# Allegro board hvps-2.brd
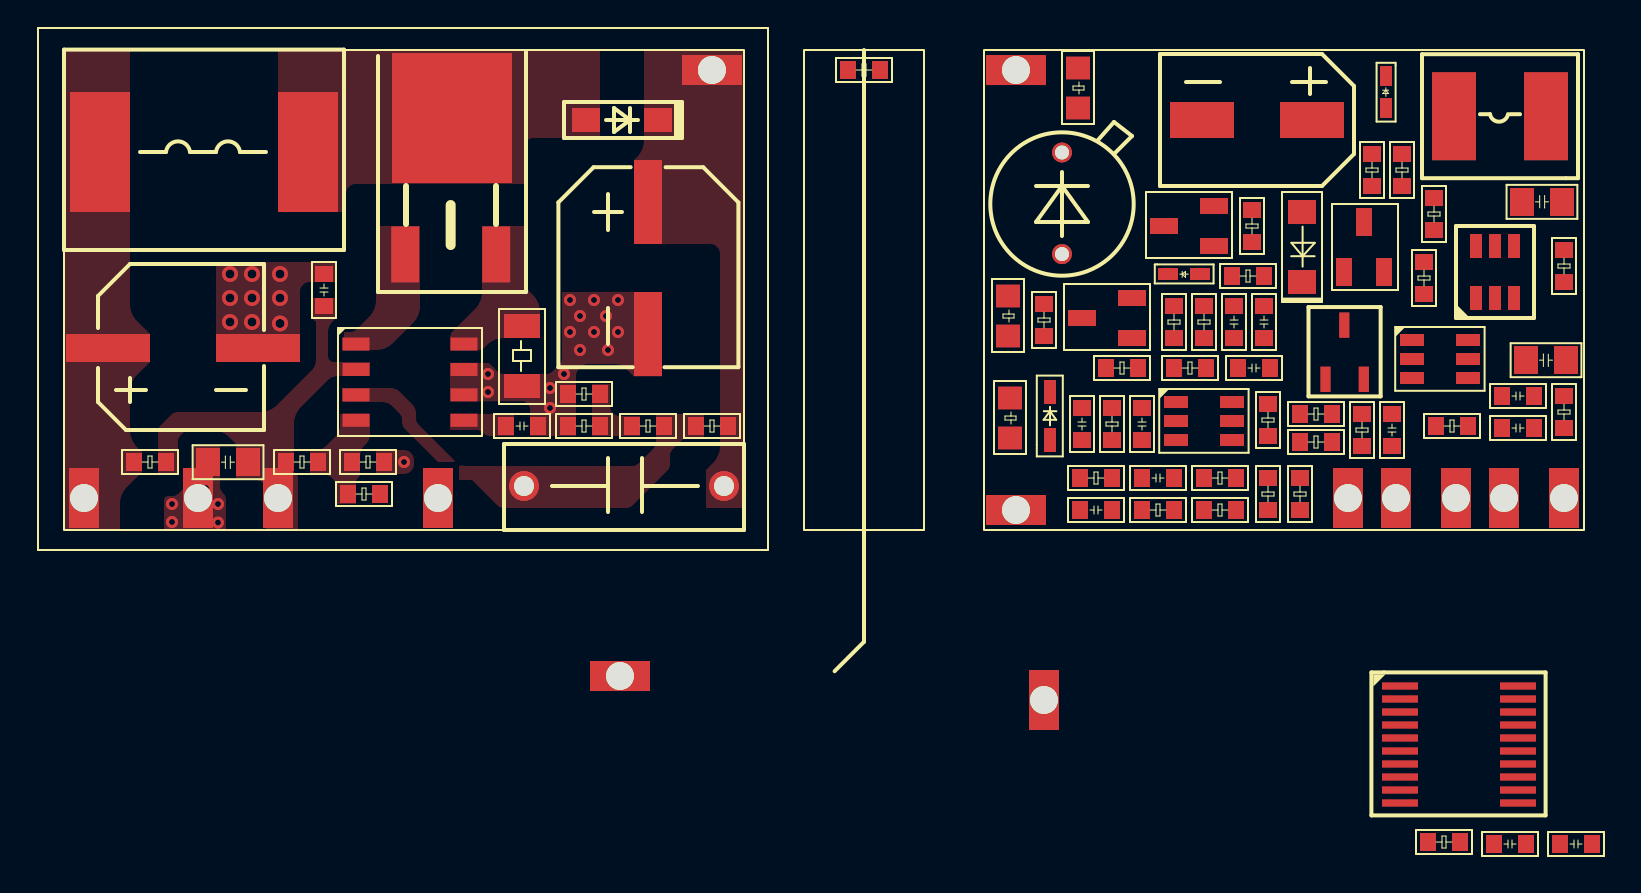
[diagram p0: board, top side]
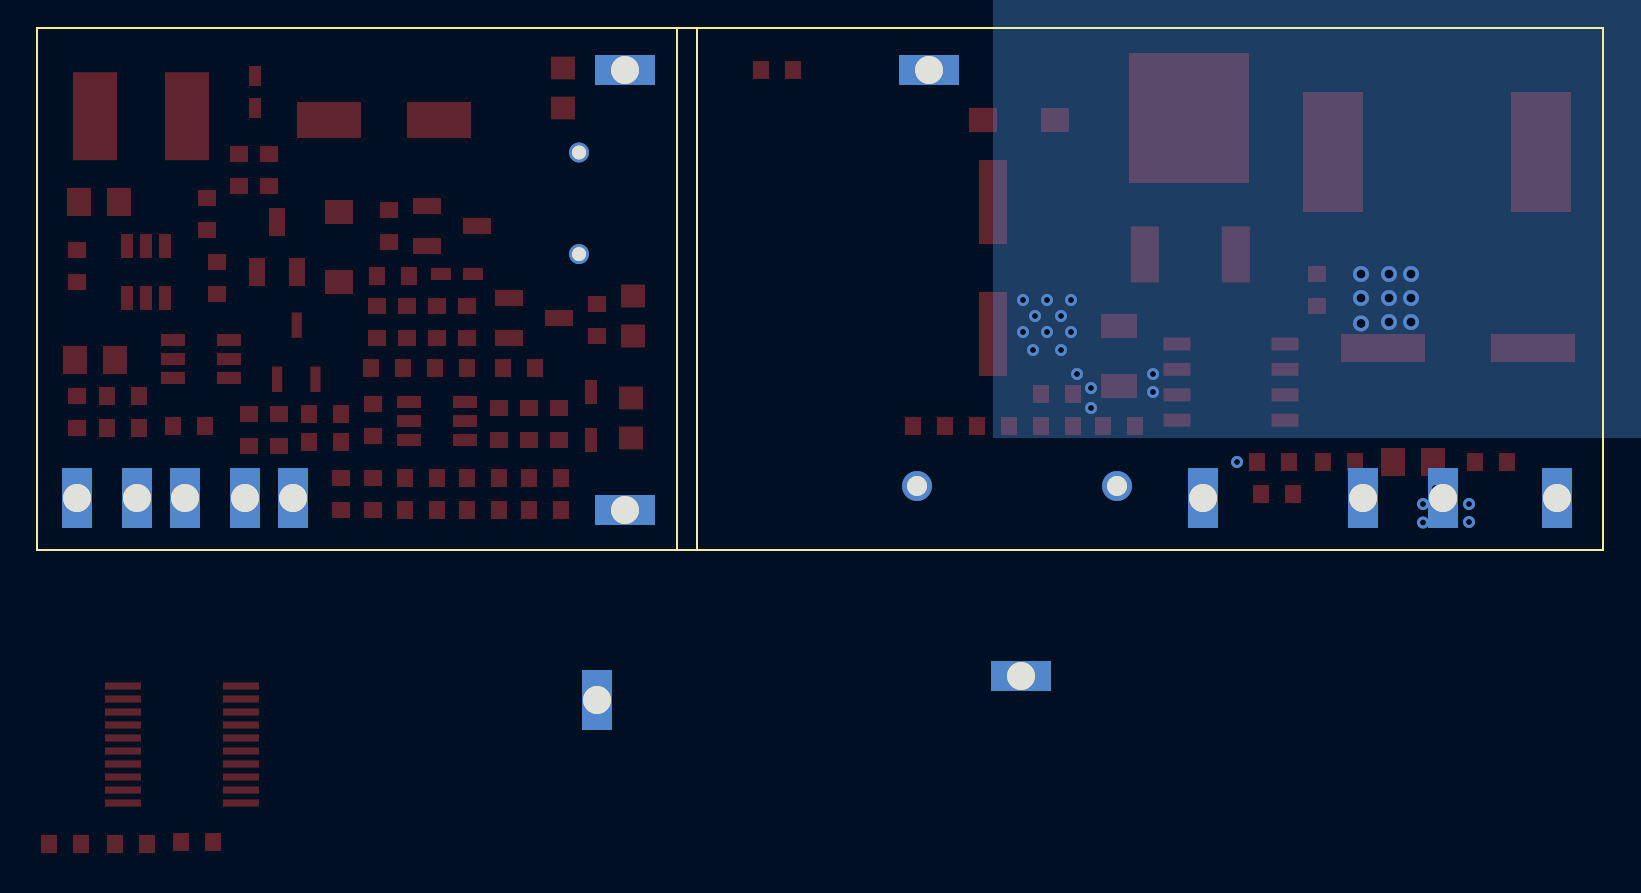
[diagram p1: board, bottom side, seen from below]

No outline. copper layers: TOP, BOTTOM. Coordinates in mm from the lowest, leftmost part position.

## Design rules (mm)
constraint set DEFAULT: min track width 0.254

## Placement (name value [footprint] x y rotation side)
C1  4.7uF/400V  [CAP-SMD-D8D0-L10D3-B8D3]  28.2 32.1 270 top
C2  0.1uF/35V  [C0603]  12 26.9 90 top
C3  220uF/35V  [CAP-SMD-D8D0-L8D3-W8D3-P7D5]  1.2 24.8 0 top
C4  10uF/35V  [C0805]  8.2 19.1 180 top
C5  0.1uF/35V  [C0603]  21.1 20.9 0 top
C6  0.1uF/400V  [CAP-THR-L11D4-W3D8-P10D0-D0D8]  32 17.9 180 top
C15  100uF/35V  [CAP-SMD-L6D6-W6D6-P5D5-MM]  61.4 36.2 180 top
C30  0.1uF/16V  [C0603]  49.9 20.2 90 top
C34  10uF/16V  [C0603]  70.9 20.8 0 top
C35  0.1uF/16V  [C0603]  70.9 22.4 0 top
C36  0.1uF/16V  [C0603]  65.4 19.9 90 top
C37  10uF/35V  [C0805]  74.1 24.2 180 top
C38  10uF/35V  [C0805]  71.9 32.1 0 top
C39  0.1uF/16V  [C0603]  73.8 0 0 top
C40  0.1uF/16V  [C0603]  70.5 0 0 top
C41  10uF/16V  [C0603]  59 25.3 90 top
C42  0.1uF/16V  [C0603]  57.5 25.3 90 top
C43  0.1uF/16V  [C0603]  52.9 21.8 270 top
C44  0.1uF/16V  [C0603]  52.9 18.3 0 top
C45  0.1uF/16V  [C0603]  49.8 16.7 0 top
C46  0.1uF/16V  [C0603]  57.7 23.8 0 top
D1  E1G  [SOD-123FL]  28.7 36.2 180 top
D2  PTVSLC3D3V3B  [SOD323-L1D8-W1D3-P2D4-MM]  48.3 20.2 90 top
D4  SAPD  [SAPD-THR-2P]  48.9 32 90 top
D7  BAS521-7  [SOD-523-L1D2-W0D8-P1D6-MM]  65.1 38.4 270 top
D11  MMSZ12T1G  [SOD-123-L2D8-W1D8-P3D5-MM]  60.9 28.1 90 top
D12  BAS521-7  [SOD-523-L1D2-W0D8-P1D6-MM]  54.2 28.5 0 top
L1  100uH/2A  [IND-SMD-L11D5-W10D0-P10D4]  0.8 34.6 0 top
L4  47uH/1A  [IND-SMD-L5D0-W5D0-P4D6-MM]  73.1 36.39 180 top
NOREF  -  []  9.7 17.3 0 top
NOREF#2  -  []  23.05 24.27 90 top
NOREF#3  -  []  6.3 20.7 90 top
NOREF#4  -  []  16.06 29.48 0 top
NOREF#5  -  []  26.8 8.4 90 top
NOREF#6  -  []  25.1 36.2 0 top
NOREF#7  -  []  21.9 22 90 top
NOREF#8  -  []  21.9 22.9 90 top
NOREF#9  -  []  16.06 29.48 0 top
NOREF#10  -  []  26.5 30.4 0 top
NOREF#11  -  []  0.7 22.95 0 top
NOREF#12  -  []  31.6 27.6 90 top
NOREF#13  -  []  28.2 25.5 90 top
NOREF#14  -  []  5.7 17.3 0 top
NOREF#15  -  []  1.2 24.8 0 top
NOREF#16  -  []  0 17.3 0 top
Q1  AOD458  [TO-252-2-DPAK]  18.4 36.3 90 top
Q3  FH3400C  [SOT-23-3-L2D9-W1D3-P1D9-MM]  52.4 27.3 0 top
Q5  FH3400C  [SOT-23-3-L2D9-W1D3-P1D9-MM]  65 28.6 270 top
Q9  AO3401A  [SOT-23-3-L2D9-W1D3-P1D9-MM]  56.5 31.9 0 top
R1  50mR  [R1206]  21.9 25.9 270 top
R2  DNP  [R0603]  25.8 22.5 180 top
R3  10K  [R0603]  25.8 20.9 180 top
R4  0  [R0603]  29 20.9 180 top
R5  1.5M  [R0603]  32.2 20.9 180 top
R6  DNP  [R0603]  10.1 19.1 0 top
R7  0  [R0603]  15 19.1 180 top
R8  DNP  [R0603]  2.5 19.1 0 top
R9  DNP  [R0603]  14.8 17.5 180 top
R10  682  [R0603]  62.4 20.1 180 top
R11  332K  [R0805]  46.2 25.4 90 top
R12  0  [R0603]  48 25.4 90 top
R16  10K  [R0603]  67.6 20.9 0 top
R18  1M  [R0603]  59 28.4 180 top
R22  1K  [R0603]  58.4 31.7 270 top
R26  1K  [R0603]  67.5 30.7 90 top
R28  100  [R0603]  67 27.5 90 top
R33  182K  [R0603]  64.4 34.5 270 top
R35  10K  [R0603]  65.9 32.9 90 top
R36  0  [R0603]  74 20.8 90 top
R40  10K  [R0603]  74 28.1 90 top
R41  100K  [R0805]  46.3 20.3 90 top
R42  100  [R0603]  56 26.9 270 top
R43  1K  [R0603]  54.5 25.3 90 top
R56  100K  [R0603]  51.4 20.2 90 top
R57  4.99K  [R0603]  60.8 21.5 0 top
R60  499  [R0603]  59.2 16.7 90 top
R61  0  [R0603]  54.5 23.8 0 top
R62  10K  [R0603]  63.9 19.9 90 top
R63  1K  [R0603]  60.8 16.7 90 top
R64  0  [R0603]  67.2 0.1 0 top
R65  4.99K  [R0603]  56 16.7 0 top
R66  4.99K  [R0603]  54.5 16.7 180 top
R67  100K  [R0603]  49.8 18.3 0 top
R68  4.99K  [R0603]  59.2 22 270 top
R69  100K  [R0603]  56 18.3 0 top
R70  100K  [R0603]  51.1 23.8 0 top
R71  0  [R0805]  49.7 36.8 90 top
R72  0  [R0603]  38.2 38.7 0 top
TP1  T POINT F  [STAMP_HOLE_1D5X3D0_1D4]  26.8 8.4 270 top
TP2  T POINT F  [STAMP_HOLE_1D5X3D0_1D4]  31.4 38.7 270 top
TP3  T POINT F  [STAMP_HOLE_1D5X3D0_1D4]  0 17.3 180 top
TP4  T POINT F  [STAMP_HOLE_1D5X3D0_1D4]  5.7 17.3 180 top
TP5  T POINT F  [STAMP_HOLE_1D5X3D0_1D4]  9.7 17.3 180 top
TP6  T POINT F  [STAMP_HOLE_1D5X3D0_1D4]  17.7 17.3 180 top
TP16  QUENCH  [STAMP_HOLE_1D5X3D0_1D4]  68.6 17.3 180 top
TP25  RESET  [STAMP_HOLE_1D5X3D0_1D4]  63.2 17.3 180 top
TP32  T POINT F  [STAMP_HOLE_1D5X3D0_1D4]  71 17.3 180 top
TP33  T POINT F  [STAMP_HOLE_1D5X3D0_1D4]  74 17.3 180 top
TP34  T POINT F  [STAMP_HOLE_1D5X3D0_1D4]  48 7.2 0 top
TP36  T POINT F  [STAMP_HOLE_1D5X3D0_1D4]  46.6 38.7 90 top
TP37  T POINT F  [STAMP_HOLE_1D5X3D0_1D4]  46.6 16.7 90 top
TP38  PULSE  [STAMP_HOLE_1D5X3D0_1D4]  65.6 17.3 180 top
U1  MAX1771ESA+  [SO-8]  19 25 270 top
U2  TLV3501AIDBVR  [SOT-23-6-L2D9-W1D6-PD0D95-CD2D8-MM]  66.4 25.2 0 top
U5  MAX5026EUT-T  [SOT23-6]  70.5 28.6 0 top
U8  TL431  [SOT-23-3-TL431]  61.6 22.8 0 top
U9  TXS0108EPW  [TSSOP-20-L6D5-W4D4-PD0D65-CD6D5-MM]  65.8 7.9 0 top
U10  OPA357AIDBVR  [SOT-23-6-L2D9-W1D6-PD0D95-CD2D8-MM]  54.6 22.1 0 top

## Library data of the parts
C1 C3 C6 C15 = C
C2 C4 C5 C30 C34-C46 = CAP NP
D1 D4 D7 D12 = DIODE
D2 = DIODE SCHOTTKY
D11 = DIODE ZENER
L1 L4 = INDUCTOR
Q1 = IRF644PbF
Q3 Q5 = FH3400C
Q9 = BSP316P_0
R1-R12 R16 R18 R22 R26 R28 R33 R35 R36 R40-R43 R56 R57 R60-R72 = R
TP1-TP6 TP16 TP25 TP32-TP34 TP36-TP38 = T POINT F
U1 = MAX1771ESA+
U2 = TLV3501AIDBVR
U5 = MAX5026EUT-T
U8 = TL431/TI
U9 = TXS0108EPW
U10 = OPA357AIDBVR

## Footprints (pads in the part's own frame, mm; a bottom-side part is the same pattern mirrored in y, then rotated)
C0603
  rect 0.8x0.9 smd: 1(0,0) 2(1.6,0)
C0805
  rect 1.2x1.4 smd: 1(0,0) 2(2,0)
CAP-SMD-D8D0-L8D3-W8D3-P7D5
  rect 4.2x1.4 smd: 1(0,0) 2(7.5,0)
CAP-SMD-D8D0-L10D3-B8D3
  rect 4.2x1.4 smd: 1(0,0) 2(6.6,0)
CAP-SMD-L6D6-W6D6-P5D5-MM
  rect 3.2x1.8 smd: 1(0,0) 2(5.5,0)
CAP-THR-L11D4-W3D8-P10D0-D0D8
  round 1.5 hole 1: 1(0,0) 2(10,0)
IND-SMD-L5D0-W5D0-P4D6-MM
  rect 2.2x4.4 smd: 1(0,0) 2(4.6,0)
IND-SMD-L11D5-W10D0-P10D4
  rect 3x6 smd: 1(0,0) 2(10.4,0)
R0603
  rect 0.8x0.9 smd: 1(0,0) 2(1.6,0)
R0805
  rect 1.14x1.2 smd: 1(0,0) 2(2,0)
R1206
  rect 1.2x1.8 smd: 1(0,0) 2(3,0)
SAPD-THR-2P
  round 1 hole 0.7: 1(2.576,0) 2(-2.504,0)
SO-8
  rect 0.65x1.35 smd: 1(0,-5.4) 2(1.27,-5.4) 3(2.54,-5.4) 4(3.81,-5.4) 5(3.81,0) 6(2.54,0) 7(1.27,0) 8(0,0)
SOD323-L1D8-W1D3-P2D4-MM
  rect 1.2x0.6 smd: 1(0,0) 2(2.4,0)
SOD-123-L2D8-W1D8-P3D5-MM
  rect 1.2x1.4 smd: 1(0,0) 2(3.5,0)
SOD-123FL
  rect 1.4x1.2 smd: 1(0,0) 2(3.6,0)
SOD-523-L1D2-W0D8-P1D6-MM
  rect 1x0.6 smd: 1(0,0) 2(1.6,0)
SOT23-6
  rect 0.6x1.2 smd: 1(-0.9,-1.3) 2(0.05,-1.3) 3(1,-1.3) 4(1,1.3) 5(0.05,1.3) 6(-0.9,1.3)
SOT-23-3-L2D9-W1D3-P1D9-MM
  rect 1.4x0.8 smd: 1(0,-2) 2(0,0) 3(-2.5,-1)
SOT-23-3-TL431
  rect 0.51x1.27 smd: 1(0.476,0.434) 2(1.415,3.142) 3(2.391,0.434)
SOT-23-6-L2D9-W1D6-PD0D95-CD2D8-MM
  rect 1.2x0.6 smd: 1(0,0) 2(0,-0.95) 3(0,-1.9) 4(2.8,-1.9) 5(2.8,-0.95) 6(2.8,0)
STAMP_HOLE_1D5X3D0_1D4
  rect 1.5x3 hole 1.4: 1(0,0)
TO-252-2-DPAK
  rect 2.8x1.4 smd: 1(-6.82,2.34) 3(-6.82,-2.21)
  rect 6.5x6 smd: 2(0,0)
TSSOP-20-L6D5-W4D4-PD0D65-CD6D5-MM
  rect 1.8x0.36 smd: 1(0,0) 2(0,-0.65) 3(0,-1.3) 4(0,-1.95) 5(0,-2.6) 6(0,-3.25) 7(0,-3.9) 8(0,-4.55) 9(0,-5.2) 10(0,-5.85) 11(5.9,-5.85) 12(5.9,-5.2) 13(5.9,-4.55) 14(5.9,-3.9) 15(5.9,-3.25) 16(5.9,-2.6) 17(5.9,-1.95) 18(5.9,-1.3) 19(5.9,-0.65) 20(5.9,0)

## Nets
GND: C1.2 C2.2 C3.2 C4.2 C5.2 C39.1 C40.2 R1.2 R2.2 R3.2 R7.1 TP1.1(TP) TP4.1(TP) U1.6 U1.7 U9.11
GND_FIELD SIGNAL: C34.2 C35.2 C36.2 C41.2 C42.2 C44.2 C45.2 D2.1 Q3.2(S) Q5.2(S) R10.2 R16.2 R18.1 R26.2 R41.1 R43.2 R56.2 R66.1 R70.1 TP37.1(TP) U2.2(V-) U2.6 U8.2 U10.2(V-)
GND_QUENCH: C15.2 C37.2 C38.2 R35.2 TP34.1(TP) U5.1 U5.2
VDD5: C40.1 U9.19(VCCB)
VDD5X: C34.1 C35.1 C41.1 C42.1 R60.1 R65.2 U2.4 U10.5 U10.6
VDD33: C39.2 R64.1 U9.2
AUX_PWR_EN: R36.1 TP33.1(TP)
AUX_PWR_IN: C37.1 C38.1 L4.1 R40.1 TP32.1(TP) U5.5(VCC)
EN: R9.1 TP6.1(TP)
HV+: C1.1 C6.1 D1.1(K) R5.1 TP2.1(TP)
HVPS: R71.2 TP36.1(TP)
PHOTON_PULSE: U9.9
PULSE: R16.1 R62.1 TP38.1(TP) U2.5 U9.12
PWR_IC: C2.1 C4.1 R6.1 R8.2 TP5.1(TP) U1.2(V+)
PWR_IN: C3.1 L1.1 R8.1 TP3.1(TP)
QUENCH_VDWN: U9.1
QUENCH_VOLTAGE_DOWN: R28.1 TP16.1(TP) U9.20
RESET_DIS: U9.3
RESET_DISCHARGE: R42.1 TP25.1(TP) U9.18
VQUENCH: C15.1 D7.1(K) Q9.2(S) R22.1 R33.1
VREF: C36.1 R10.1 R57.2 R63.2
N00177: Q1.1 U1.1
N00181: Q1.3(S) R1.1 U1.8
N00224: D1.2 L1.2 Q1.2
N00671: C5.1 U1.5
N03183: R6.2 R7.2 R9.2 U1.4
N281531: C6.2 R4.1 R5.2 U1.3
N361468: R2.1 R3.1 R4.2
N365393: D7.2 L4.2 U5.6
N365573: R36.2 R40.2 U5.4
N365581: R33.2 R35.1 U5.3
N370992: D11.1(CATHODE) Q9.1 R22.2
N371048: D11.2 Q5.3
N371052: D4.2 D12.1(K) R11.2 R12.2
N371122: D12.2 Q9.3 R18.2
N371190: Q5.1 R26.1 R28.2
N371268: C30.2 D2.2(CATHODE) R11.1 R41.2
N371272: Q3.3 R12.1
N371414: Q3.1 R42.2 R43.1
N371666: C30.1 C43.2 R56.1
N372066: R57.1 R60.2 U8.1(REF) U8.3
N375383: R61.1 U2.1
N376175: R62.2 R63.1 U2.3
N378300: R64.2 U9.10
N379806: C44.1 R65.1 R66.2 R67.2
N380805: C43.1 R67.1 U10.3
N381019: R68.2 R69.2 U10.4
N381074: C46.2 R68.1 U10.1
N381200: C45.1 R69.1
N382559: C46.1 R61.2 R70.2
N382943: D4.1(K) R71.1

Pads without a net: R72 1 2; U9 4 5 6 7 8 13 14 15 16 17

## Via types
v1: diameter 0.6, hole 0.3, TOP to BOTTOM, 21 vias
v2: diameter 0.8, hole 0.45, TOP to BOTTOM, 9 vias

## Routing (per net, layer and track width the routed paths; a pad name or vN(x,y) marks a point on that pad's centre or on a via; arc(x,y) is an arc through that point)
GND:
  vias: v1(4.4,17) v1(4.4,16.1) v1(6.1,17.8) v1(6.7,17) v1(6.7,16.07) v1(16,19.1) v1(20.2,23.5) v1(20.2,22.6) v1(23.3,22.8) v1(23.3,21.8) v1(24,23.5) v1(24.3,27.2) v1(24.3,25.6) v1(24.8,26.4) v1(24.8,24.7) v1(25.5,27.2) v1(25.5,25.6) v1(26.1,26.4) v1(26.2,24.7) v1(26.7,27.2) v1(26.7,25.6) v2(7.3,28.5) v2(7.3,27.3) v2(7.3,26.1) v2(8.4,28.5) v2(8.4,27.3) v2(8.4,26.1) v2(9.8,28.5) v2(9.8,27.3) v2(9.8,26.03)

## Copper pours and planes (outline as drawn; the poured copper is in the pictures)
GND on TOP: 6.6,29.1 12.6,29.1 12.6,28.1 11.3,28.1 10.95,27.95 10.8,27.6 10.8,24.1 6.6,24.1
GND on TOP: 23.9,27.6 28.9,27.6 28.9,23.38 27.48,23.38 27.07,23.79 26.83,23.94 26.56,24 25.2,24 25.02,23.96 24.86,23.86 24.74,23.74 24.64,23.58 24.6,23.4 24.6,20.4 22.3,20.4 22.3,21.78 22.28,21.87 22.23,21.95 22.11,22.06 22.03,22.12 21.94,22.13 18.3,22.13 18.3,24.05 20.25,24.05 20.66,23.64 20.82,23.54 21,23.5 23.1,23.5 23.28,23.54 23.44,23.64 23.76,23.96 23.86,24.12 23.9,24.3
GND on TOP: 5.5,19.9 6.8,19.9 6.8,17.9 6.84,17.72 6.94,17.56 6.96,17.54 7.06,17.38 7.1,17.2 7.1,15.7 6.41,15.7 6.4,15.7 4,15.7 4,17.2 4.06,17.34 4.2,17.4 4.4,17.4 4.58,17.44 4.74,17.54 5.36,18.16 5.46,18.32 5.5,18.5
GND on BOTTOM: 28.2,20.3 28.2,45.3 -6.8,45.3 -6.8,20.3
HV+ on TOP: 28,39.7 33,39.7 33,16.8 31.1,16.8 31.1,18.7 31.45,19.05 31.71,19.44 31.8,19.9 31.8,29.5 31.65,29.85 31.3,30 27.5,30 27.5,34.2 27.65,34.35 27.91,34.74 28,35.2
PWR_IC on TOP: 11.4,27.3 12.6,27.3 12.6,26.3 12.41,26.11 12.26,25.88 12.2,25.6 12.2,24.4 12.29,24.19 12.5,24.1 14.3,24.1 14.3,23.4 12.7,23.4 12.42,23.34 12.19,23.19 10.85,21.85 10.59,21.46 10.5,21 10.5,18.6 10.63,18.47 10.68,18.39 10.7,18.3 10.7,15.7 9.1,15.7 9.1,17.7 8.95,18.05 8.6,18.2 7.6,18.2 7.6,20 7.25,20.35 6.86,20.61 6.4,20.7 5.3,20.7 5.12,20.66 4.96,20.56 4.84,20.44 4.74,20.28 4.7,20.1 4.7,18.5 3.7,18.5 3.7,20.6 3.74,20.78 3.84,20.94 4.36,21.46 4.52,21.56 4.7,21.6 8.8,21.6 9.26,21.69 9.65,21.95 11.39,23.69 11.54,23.92 11.6,24.2 11.6,26.1 11.4,26.3
PWR_IN on TOP: -1,39.7 2.3,39.7 2.3,27 2.39,26.54 2.65,26.15 3.3,25.5 3.3,24.1 2.65,23.45 2.39,23.06 2.3,22.6 2.3,20.7 2.39,20.24 2.65,19.85 2.9,19.6 2.9,18.6 2.15,17.85 1.89,17.46 1.8,17 1.8,15.7 -1,15.7
N00177 on TOP: 14.6,30.9 16.8,30.9 16.8,26.9 16.71,26.44 16.45,26.05 15.45,25.05 15.06,24.79 14.6,24.7 13,24.7 13,25.6 13.3,25.6 13.48,25.64 13.64,25.74 14.25,26.35 14.51,26.74 14.6,27.2
N00181 on TOP: 19.9,30.9 22,30.9 22,28.4 22.09,27.94 22.35,27.55 22.45,27.45 22.71,27.06 22.8,26.6 22.8,25.3 21,25.3 20.54,25.21 20.15,24.95 20.04,24.84 19.88,24.74 19.7,24.7 18.3,24.7 18.3,25.3 18.34,25.48 18.44,25.64 19.55,26.75 19.81,27.14 19.9,27.6
N00224 on TOP: 9.7,39.7 25.8,39.7 25.8,35.3 22.5,35.3 22.15,35.15 22,34.8 22,33 13.6,33 13.25,32.85 13.1,32.5 13.1,31.6 9.7,31.6
N00671 on TOP: 18.3,21.5 18.3,20.7 19.6,20.7 19.78,20.66 19.94,20.56 19.96,20.54 20.12,20.44 20.3,20.4 21.5,20.4 21.5,21.5
N03183 on TOP: 12.8,21.5 14.3,21.5 14.3,20.5 14.24,20.22 14.09,19.99 14.01,19.91 13.86,19.68 13.8,19.4 13.8,18.5 13.78,18.41 13.73,18.33 13.67,18.27 13.62,18.19 13.6,18.1 13.6,17 12.6,17 12.6,17.9 12.56,18.08 12.46,18.24 12.41,18.29 12.18,18.44 11.9,18.5 11.3,18.5 11.3,19.7 11.6,19.7 11.88,19.76 12.11,19.91 12.59,20.39 12.74,20.62 12.8,20.9
N281531 on TOP: 12.9,22.8 15.3,22.8 15.58,22.74 15.81,22.59 16.39,22.01 16.54,21.78 16.6,21.5 16.6,21.3 16.64,21.12 16.74,20.96 18.59,19.11 18.82,18.96 19.1,18.9 27.4,18.9 27.58,18.94 27.74,19.04 28.46,19.76 28.56,19.92 28.6,20.1 28.6,21.5 31,21.5 31,20.3 30.2,20.3 30.02,20.26 29.86,20.16 29.44,19.74 29.34,19.58 29.3,19.4 29.3,19 29.26,18.82 29.16,18.66 27.44,16.94 27.28,16.84 27.1,16.8 21,16.8 20.82,16.84 20.66,16.94 19.4,18.2 18.8,18.2 18.62,18.24 18.46,18.34 16.04,20.76 15.94,20.92 15.9,21.1 15.9,21.2 15.86,21.38 15.76,21.54 15.41,21.89 15.18,22.04 14.9,22.1 12.9,22.1
N361468 on TOP: 25.4,23 26.3,23 26.3,21.9 26.45,21.55 26.8,21.4 27.8,21.4 27.8,20.4 25.4,20.4
GND on TOP: 14.6,19.7 16,19.7 16.35,19.55 16.5,19.2 16.5,19 16.35,18.65 16,18.5 14.6,18.5
